# EAGLE board hydrogen_sensors_board (EAGLE 7.7.0)
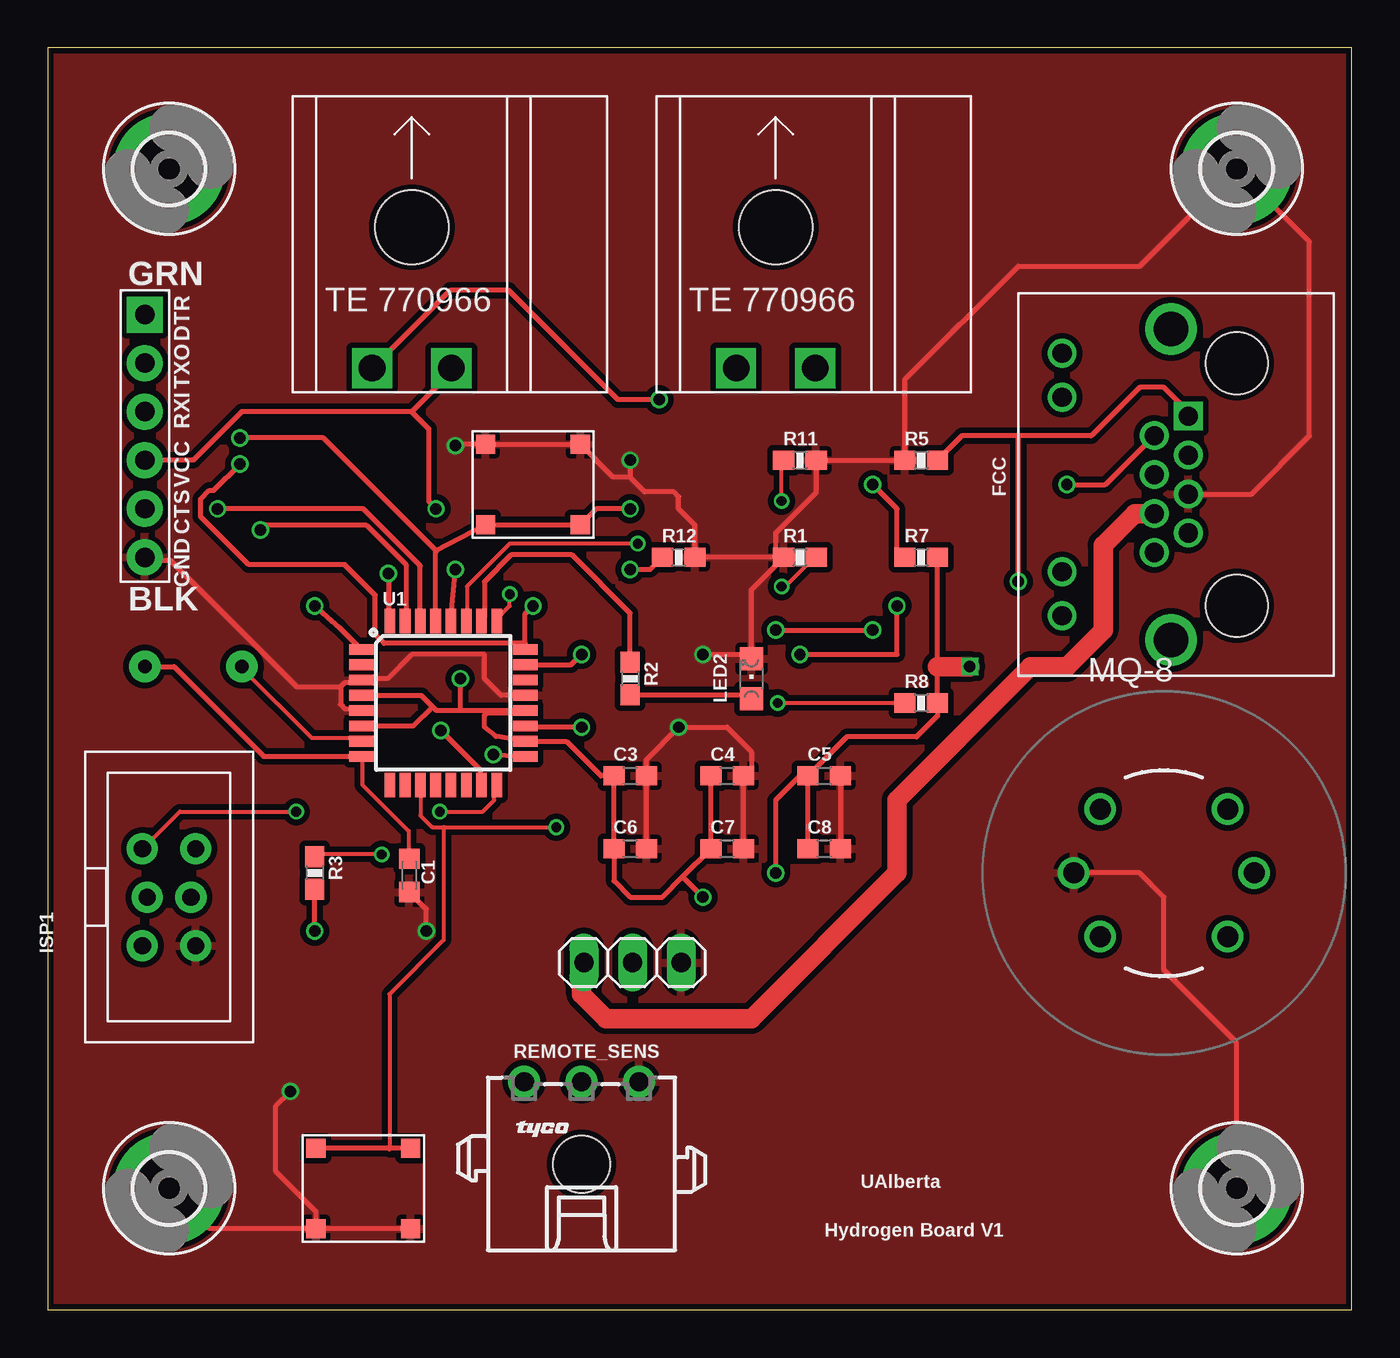
[diagram p0: board, top side]
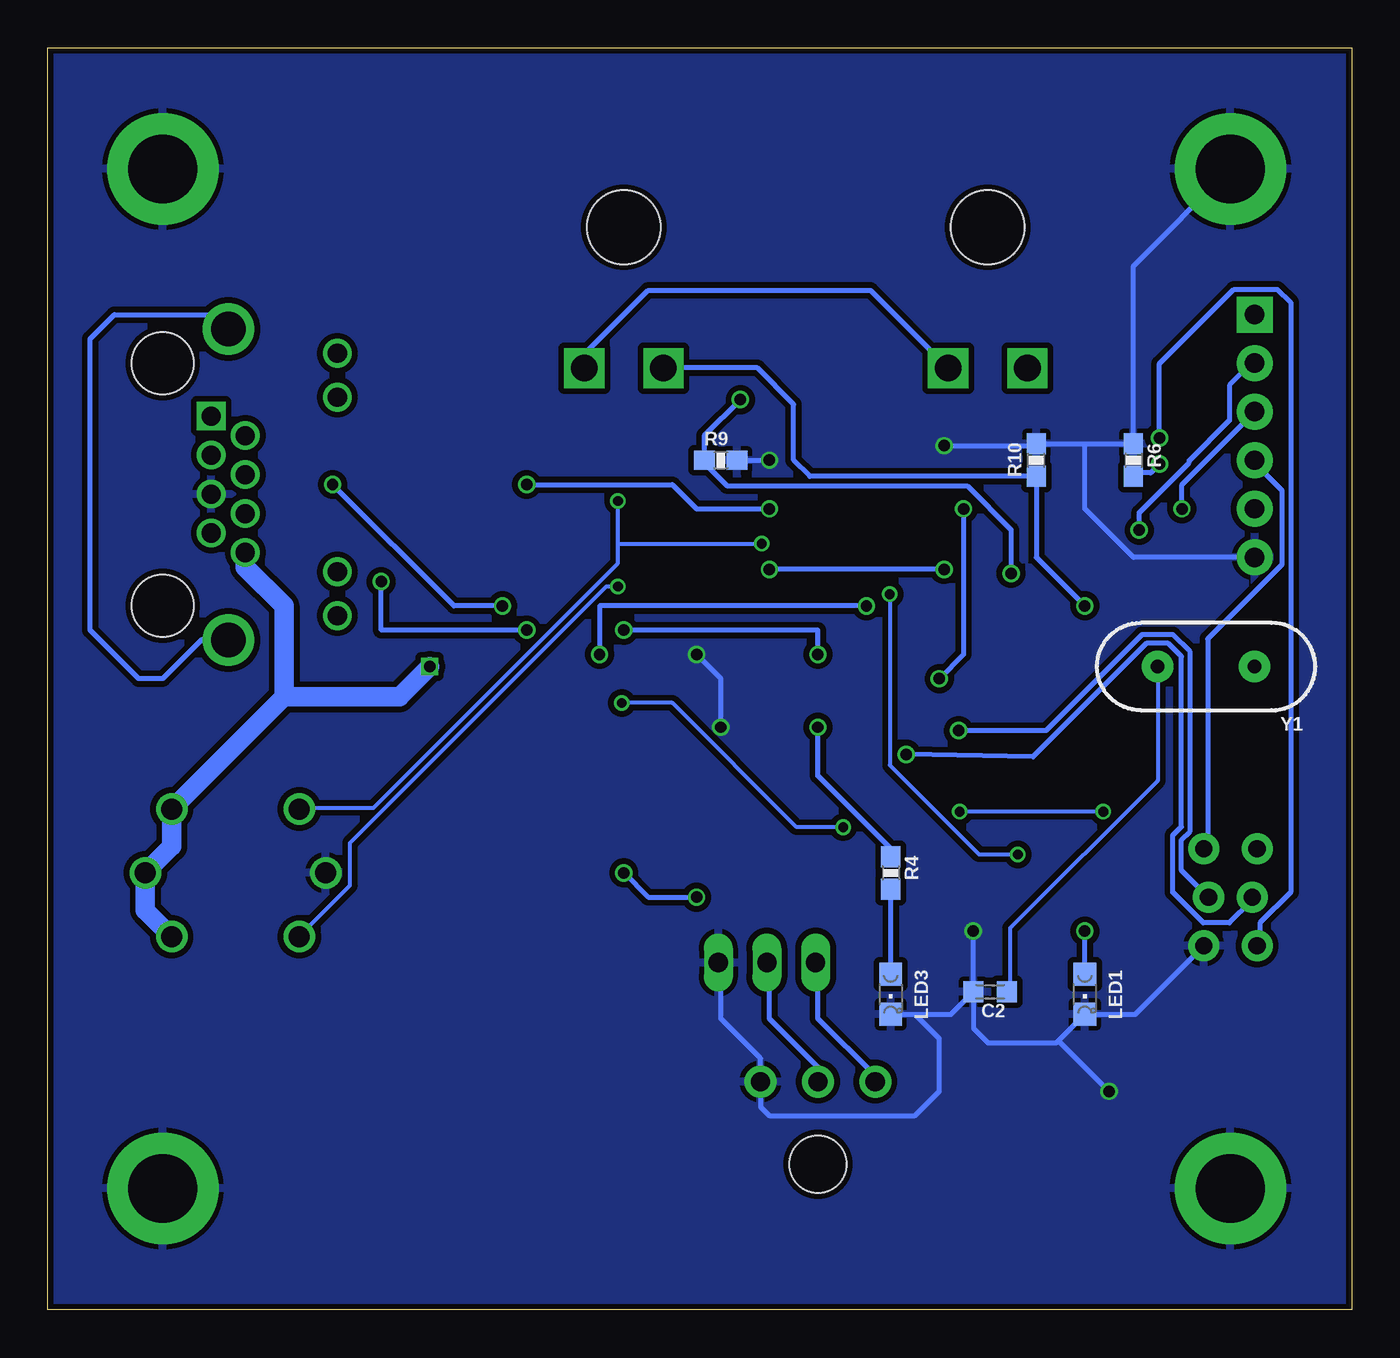
[diagram p1: board, bottom side, seen from below]

Size 68.25 x 66.03 mm. Coordinates in mm from the lower left corner, seen from the top.
Outline: 0,0 68.25,0 68.25,66.03 0,66.03 0,0
Copper layers (1*16): Top 0.035mm / dielectric 1.5mm / Bottom 0.035mm
Design rules "SeeedStudio_2layer_DRU_no_angle_20140221": minimum track width 6mil, minimum drill 12mil, track to track 6mil, track to pad 6mil, pad to pad 6mil, via to via 6mil, smd to smd 0mil, copper to edge 10mil, drill to drill 10mil, minimum pad ring 10mil, minimum via ring 6mil, stop-mask expansion 2mil, vias tented up to drill 100mil, thermal gap 10mil

## Footprints (pad centres in the part's own frame; a part is rotated, then mirrored left to right if it is on the bottom)
C0603K = smd 1.05 x 1.08: 1 -0.875,0; 2 0.875,0
C0603 = smd 1.1 x 1: 1 -0.85,0; 2 0.85,0
A122645-ND = drill 1 square: P$1 3.58,2.54 | drill 1: P$2 2.56,4.32; P$3 1.54,2.54; P$4 0.52,4.32; P$5 -0.5,2.54; P$6 -1.52,4.32; P$7 -2.54,2.54; P$8 -3.56,4.32; P$9 -6.86,9.14; P$10 -4.57,9.14; P$11 4.57,9.14; P$12 6.86,9.14 | drill 1.8: P$13 -8.13,3.43; P$14 8.13,3.43 | hole 3.25: -6.35,0; 6.35,0
3,6-PAD = drill 3.6 pad 5.842: B3,6 0,0
AVRISP-BOX = drill 0.9 pad 1.626: 1 -1.397,2.54; 2 1.397,2.54; 3 -1.143,0; 4 1.143,0; 5 -1.397,-2.54; 6 1.397,-2.54
1X03 = drill 1.016 long: 1 -2.54,0; 2 0,0; 3 2.54,0
FTDI_DEVICE_SIDE = drill 1.016 pad 1.88 square: P$1 -6.35,0 | drill 1.016 pad 1.88: P$2 -3.81,0; P$3 -1.27,0; P$4 1.27,0; P$5 3.81,0; P$6 6.35,0
CHIPLED_0805 = smd 1.2 x 1.2: A 0,-1.05; C 0,1.05
0603-RES = smd 1.1 x 1: 1 -0.85,0; 2 0.85,0
1445055-3 = drill 1 pad 1.676: 1 3,4.32; 2 0,4.32; 3 -3,4.32 | hole 3: 0,0
TQFP32-08 = smd 1.27 x 0.559: 1 -4.293,2.8; 2 -4.293,2; 3 -4.293,1.2; 4 -4.293,0.4; 5 -4.293,-0.4; 6 -4.293,-1.2; 7 -4.293,-2; 8 -4.293,-2.8; 17 4.293,-2.8; 18 4.293,-2; 19 4.293,-1.2; 20 4.293,-0.4; 21 4.293,0.4; 22 4.293,1.2; 23 4.293,2; 24 4.293,2.8 | smd 0.559 x 1.27: 9 -2.8,-4.293; 10 -2,-4.293; 11 -1.2,-4.293; 12 -0.4,-4.293; 13 0.4,-4.293; 14 1.2,-4.293; 15 2,-4.293; 16 2.8,-4.293; 25 2.8,4.293; 26 2,4.293; 27 1.2,4.293; 28 0.4,4.293; 29 -0.4,4.293; 30 -1.2,4.293; 31 -2,4.293; 32 -2.8,4.293
MQ-8 = drill 1.1: 1 -3.337,3.337; 2 -4.72,0; 3 -3.337,-3.337; 4 3.337,-3.337; 5 4.72,0; 6 3.337,3.337
EG4621CT-ND = smd 1 x 1: P$1 -2.475,2.1; P$2 2.475,2.1; P$3 -2.475,-2.1; P$4 2.475,-2.1
2X1-MATE-N-LOCK = drill 1.4 square: CIRCUIT1 -2.07,14.23; CIRCUIT2 2.07,14.23 | hole 3.86: 0,6.86
HC49US = drill 0.7 pad 1.651: 1 -2.54,0; 2 2.54,0

## Placement (x,y rotation side)
C1  22pF  [C0603K]  18.92,22.73 270 top
C2  22pF  [C0603K]  18.92,16.64 180 bottom
C3  [C0603]  30.48,27.94 0 top
C4  [C0603]  35.56,27.94 0 top
C5  [C0603]  40.64,27.94 0 top
C6  [C0603]  30.48,24.13 0 top
C7  [C0603]  35.56,24.13 0 top
C8  [C0603]  40.64,24.13 0 top
ETH1  FCC  [A122645-ND]  62.23,43.18 90 top
H1  MOUNT-PAD-ROUND3.6  [3,6-PAD]  6.35,59.69 0 top
H2  MOUNT-PAD-ROUND3.6  [3,6-PAD]  62.23,59.69 0 top
H3  MOUNT-PAD-ROUND3.6  [3,6-PAD]  62.23,6.35 0 top
H4  MOUNT-PAD-ROUND3.6  [3,6-PAD]  6.35,6.35 0 top
ISP1  AVRISP-BOX  [AVRISP-BOX]  6.35,21.59 0 top
JP4  [1X03]  30.61,18.16 180 top
JP6  FTDI_DEVICE  [FTDI_DEVICE_SIDE]  5.08,45.72 270 top
LED1  [CHIPLED_0805]  13.97,16.51 180 bottom
LED2  [CHIPLED_0805]  36.83,33.02 0 top
LED3  [CHIPLED_0805]  24.13,16.51 180 bottom
R1  10k  [0603-RES]  39.37,39.37 0 top
R2  1k  [0603-RES]  30.48,33.02 270 top
R3  1k  [0603-RES]  13.97,22.86 270 top
R4  1k  [0603-RES]  24.13,22.86 270 bottom
R5  10k  [0603-RES]  45.72,44.45 0 top
R6  10k  [0603-RES]  11.43,44.45 270 bottom
R7  10k  [0603-RES]  45.72,39.37 0 top
R8  10k  [0603-RES]  45.72,31.75 0 top
R9  10k  [0603-RES]  33.02,44.45 0 bottom
R10  10k  [0603-RES]  16.51,44.45 90 bottom
R11  100k  [0603-RES]  39.37,44.45 0 top
R12  100k  [0603-RES]  33.02,39.37 0 top
REMOTE_SENS  1445055-3  [1445055-3]  27.94,7.62 0 top
U1  ATMEGA328P_TQFP  [TQFP32-08]  20.7,31.75 0 top
U$1  MQ-8MQ-8  [MQ-8]  58.42,22.86 0 top
U$2  EG4621CT-ND  [EG4621CT-ND]  16.51,6.35 180 top
U$3  TE770966  [2X1-MATE-N-LOCK]  38.1,63.5 180 top
U$9  TE770966  [2X1-MATE-N-LOCK]  19.05,63.5 180 top
U$10  EG4621CT-ND  [EG4621CT-ND]  25.4,43.18 0 top
Y1  16MHz  [HC49US]  7.62,33.66 180 bottom

## Library data of the parts
C1-C8 ISP1 LED1-LED3 = adafruit
ETH1 = ETHERNET
H1-H4 = holes
JP4 = pinhead
JP6 = SparkFun-Connectors
R1 R5 R6 R9 R10 = SparkFun-Passives
R2-R4 R7 R8 R11 R12 = SparkFun-Resistors
REMOTE_SENS = con-amp
U1 = SparkFun-DigitalIC; PROD_ID: IC-09069
U$1 = donny_library
U$2 U$10 = EG4621CT-ND
U$3 U$9 = Shell2013
Y1 = SparkFun-FreqCtrl

## Nets
+5V: C3.1 C4.1 C5.1 C6.1 C7.1 C8.1 ETH1.P$8 ISP1.2 JP6.P$4 R7.2 R8.2 U1.4 U1.6 U1.18 U1.20 U$1.4 U$1.5 U$1.6 U$3.CIRCUIT1 U$9.CIRCUIT1
+12V: ETH1.P$6 JP4.3 REMOTE_SENS.3
ATM_RESET: ISP1.5 R7.1 U1.29 U$10.P$3 U$10.P$4
ESTOP1: R9.1 U1.32 U$9.CIRCUIT2
ESTOP2: R10.1 U1.1 U$3.CIRCUIT2
EXTRA_SIG: ETH1.P$2 R6.2 U1.24
GND: C1.2 C2.2 C3.2 C4.2 C5.2 C6.2 C7.2 C8.2 ETH1.P$5 H1.B3,6 H2.B3,6 H3.B3,6 H4.B3,6 ISP1.6 JP4.1 JP6.P$6 LED1.C LED2.C LED3.C R1.1 R5.1 R6.1 R9.2 R10.2 R11.2 R12.2 REMOTE_SENS.1 U1.3 U1.5 U1.21 U$1.2 U$2.P$1 U$2.P$2 U$10.P$1 U$10.P$2
H2_OK: ETH1.P$1 R5.2 U1.23
H2_REMOTE: JP4.2 REMOTE_SENS.2
H2OUT: R11.1 U1.27 U$1.1
H2OUT_2: R12.1 U1.28
MISO: ISP1.1 U1.16
MOSI: ISP1.4 U1.15
N$1: C2.1 U1.7 Y1.2
N$2: R1.2 U$1.3
N$3: C1.1 U1.8 Y1.1
N$4: R3.1 U1.25
N$5: R2.1 U1.26
N$6: R4.1 U1.19
N$7: LED1.A R3.2
N$8: LED2.A R2.2
N$9: LED3.A R4.2
N$10: ETH1.P$13 ETH1.P$14
N$16: ETH1.P$3
N$22: ETH1.P$10
N$23: ETH1.P$9
N$24: ETH1.P$12
N$25: ETH1.P$11
RXD: JP6.P$3 U1.30
SCK: ISP1.3 U1.17
TARE: R8.1 U1.11 U$2.P$3 U$2.P$4
TXD: JP6.P$2 U1.31

## Tracks (layer width: path | path; a pad name or v marks a point on that pad's centre or on a via)
+5V  (via drill 0.6)
  Top 0.254: U$9.CIRCUIT1 21.12,49.06 19.05,46.99 | 19.05,46.99 10.16,46.99 7.62,44.45 JP6.P$4 | 21.59,31.35 U1.20 24.89,31.24 22.99,31.24 22.86,31.11 22.86,30.48 23.46,30 U1.18 25.03,29.72 27.18,29.72 28.96,27.94 C3.1 C6.1 29.63,22.44 30.48,21.59 32.17,21.59 33.23,22.65 | 21.59,31.35 20.34,31.35 20.13,31.56 | 20.13,31.56 19.56,32.13 16.43,32.13 U1.4 | U1.6 19.12,30.55 20.13,31.56 | 19.05,46.99 19.94,46.1 19.94,42.29 v20.32,41.91 | v21.59,33.02 21.59,31.35 | R7.2 46.57,33.66 R8.2 46.57,31.08 45.47,29.97 41.82,29.97 C5.1 | C8.1 C5.1 | C4.1 C7.1 33.23,22.65 | C5.1 39.37,27.94 38.1,26.67 v38.1,22.86 | v34.29,21.59 33.23,22.65
  Top 1.016: v48.26,33.66 46.57,33.66
  Bottom 0.254: U$3.CIRCUIT1 40.17,50 36.83,53.34 25.19,53.34 U$9.CIRCUIT1 | v20.32,41.91 20.32,34.29 v21.59,33.02 | ISP1.2 7.54,24.13 7.54,35.1 3.66,38.99 3.66,42.88 5.03,44.25 JP6.P$4 | v38.1,22.86 36.83,21.59 v34.29,21.59
  Bottom 1.016: ETH1.P$8 57.91,38.86 55.88,36.83 55.88,32.08 | 55.88,32.08 U$1.6 61.76,24.24 U$1.5 63.14,20.91 U$1.4 | 55.88,32.08 49.84,32.08 v48.26,33.66
+12V
  Top 1.016: ETH1.P$6 56.9,41.66 55.24,40.01 55.24,35.56 53.34,33.66 51.44,33.66 44.45,26.67 44.45,22.86 36.83,15.24 29.21,15.24 27.94,16.51 27.94,18.03 JP4.3
  Bottom 0.254: REMOTE_SENS.3 24.94,12.24 27.94,15.24 27.94,18.03 JP4.3
ATM_RESET  (via drill 0.6, 0.61)
  Top 0.254: U1.29 20.3,39.67 | 20.3,39.67 20.3,39.73 U$10.P$3 U$10.P$4 28.7,41.91 v30.48,41.91 | R7.1 44.45,39.37 44.45,41.91 v43.18,43.18 | v10.06,45.62 14.4,45.62 20.34,39.67 20.3,39.67
  Bottom 0.254: v43.18,43.18 35.56,43.18 34.29,41.91 v30.48,41.91 | v10.06,45.62 10.06,49.51 6.17,53.39 3.89,53.39 3.2,52.7 3.2,21.84 4.8,20.24 4.8,19.1 ISP1.5
ESTOP1  (via drill 0.6, 0.61)
  Top 0.254: v32,47.62 29.84,47.62 24.13,53.34 21.05,53.34 U$9.CIRCUIT2 | v17.83,38.53 17.83,36.25 U1.32
  Bottom 0.254: v32,47.62 33.87,45.76 R9.1 33.83,44.25 32.69,43.1 20.12,43.1 17.83,40.82 v17.83,38.53
ESTOP2  (via drill 0.6)
  Top 0.254: v13.97,36.83 15.24,35.72 U1.1
  Bottom 0.254: U$3.CIRCUIT2 31.11,49.28 29.21,47.37 29.21,44.45 28.36,43.6 R10.1 16.51,39.37 v13.97,36.83
EXTRA_SIG  (via drill 0.6, 0.61)
  Top 0.254: U1.24 24.99,34.87 | 24.99,34.87 24.99,36.42 v25.4,36.83 | v39.37,34.29 44.45,34.29 v44.45,36.83 | v53.34,43.18 55.35,43.18 ETH1.P$2 | v10.06,44.25 8.69,42.88 8.46,42.88 8,42.42 8,41.5 10.52,38.99 15.54,38.99 17.14,37.39 17.14,35.33 17.6,34.87 24.99,34.87
  Bottom 0.254: v25.4,36.83 39.37,36.83 v39.37,34.29 | v44.45,36.83 46.99,36.83 v53.34,43.18 | v10.06,44.25 10.52,43.79 11.43,43.79 R6.2
GND  (via drill 0.6)
  Top 0.254: R1.1 R12.2 33.87,41.06 33.02,41.91 33.02,42.55 32.77,42.8 31.24,42.8 30.48,43.56 | R1.1 36.83,37.68 LED2.C 36.61,34.29 v34.29,34.29 | R1.1 38.1,39.79 38.1,40.64 40.22,42.76 R11.2 R5.1 44.87,48.68 50.8,54.61 57.15,54.61 H2.B3,6 66.04,55.88 66.04,45.72 63,42.68 ETH1.P$5 | v21.34,45.21 21.4,45.28 U$10.P$1 U$10.P$2 29.59,43.56 30.48,43.56 | U1.21 23.73,32.15 22.86,33.02 22.86,34.29 19.05,34.29 17.78,33.02 16.48,33.02 U1.3 16.23,32.82 15.54,32.82 15.32,32.59 | v30.48,44.45 30.48,43.56 | 15.32,32.59 15.32,31.67 15.54,31.45 16.23,31.45 U1.5 | 15.32,32.59 13.03,32.59 6.4,39.22 5.26,39.22 JP6.P$6 | H3.B3,6 62.23,13.97 58.42,17.78 58.42,21.59 57.15,22.86 U$1.2 | C5.2 C8.2 | U$2.P$1 U$2.P$2 | U$2.P$2 8.45,4.25 H4.B3,6 | U$2.P$2 14.04,5.14 11.94,7.24 11.94,10.67 v12.7,11.43 | v19.81,19.81 19.81,20.97 C1.2 | C7.2 C4.2 36.83,28.36 36.83,29.21 35.56,30.48 v33.02,30.48 31.33,28.79 C3.2 C6.2
  Bottom 0.254: 13.97,45.3 R10.2 16.6,45.21 v21.34,45.21 | 13.97,45.3 R6.1 11.43,54.61 H1.B3,6 | JP6.P$6 11.43,39.37 13.97,41.91 13.97,45.3 | R9.2 v30.48,44.45 | LED3.C 22.86,15.46 | 22.86,15.46 20.98,15.46 C2.2 | C2.2 19.8,14.72 19.05,13.97 15.46,13.97 15.35,14.08 | 15.35,14.08 LED1.C 11.34,15.46 ISP1.6 | v12.7,11.43 15.35,14.08 | C2.2 19.8,19.8 v19.81,19.81 | v33.02,30.48 33.02,33.02 v34.29,34.29 | 22.86,15.46 21.59,14.19 21.59,11.43 22.86,10.16 30.48,10.16 30.94,10.62 REMOTE_SENS.1 30.94,13.16 33.02,15.24 33.02,18.03 JP4.1
  pour Top (isolate 0.305): 0,0 0,66.04 68.58,66.04 68.58,0
  pour Bottom (isolate 0.305): 0,0 0,66.04 68.58,66.04 68.58,0
H2_OK  (via drill 0.6)
  Top 0.254: ETH1.P$1 59.69,46.99 58.42,48.26 57.15,48.26 54.61,45.72 50.8,45.72 | 50.8,45.72 47.84,45.72 R5.2 | U1.23 27.4,33.75 v27.94,34.29 | v38.1,35.56 v43.18,35.56 | v50.8,38.1 50.8,45.72
  Bottom 0.254: v27.94,34.29 27.94,35.56 v38.1,35.56 | v43.18,35.56 50.8,35.56 v50.8,38.1
H2_REMOTE
  Bottom 0.254: REMOTE_SENS.2 27.94,12.7 30.48,15.24 30.48,18.03 JP4.2
H2OUT  (via drill 0.51)
  Top 0.203: v38.41,42.32 38.41,44.35 R11.1 | v30.89,40.08 24.18,40.08 21.95,37.85 21.95,36.22 U1.27
  Bottom 0.203: 38.41,40.08 38.41,39.06 51.21,26.26 55.07,26.26 U$1.1 | 38.41,40.08 v38.41,42.32 | 38.41,40.08 v30.89,40.08
H2OUT_2  (via drill 0.6)
  Top 0.254: U1.28 21.08,36.04 v21.34,38.73 | v30.48,38.73 31.54,38.73 R12.1
  Bottom 0.254: v21.34,38.73 v30.48,38.73
MISO  (via drill 0.51)
  Top 0.203: v20.52,26.06 22.76,26.06 23.37,26.67 23.37,27.28 U1.16 | v13.01,26.06 6.91,26.06 5.08,24.23 ISP1.1
  Bottom 0.203: v13.01,26.06 v20.52,26.06
MOSI  (via drill 0.61)
  Top 0.254: v20.57,30.3 22.63,28.25 22.63,27.56 U1.15
  Bottom 0.254: v20.57,30.3 16,30.3 10.97,35.33 9.37,35.33 8.46,34.42 8.46,25.04 8.91,24.59 8.91,22.99 7.54,21.61 ISP1.4
N$1
  Top 0.203: U1.7 16.26,29.92 13.82,29.92 10.16,33.58 Y1.2
  Bottom 0.203: Y1.2 10.16,27.69 17.88,19.96 17.88,16.71 C2.1
N$2  (via drill 0.51)
  Top 0.203: v38.41,37.85 38.61,37.85 40.03,39.27 R1.2
  Bottom 0.203: v38.41,37.85 39.01,37.85 52.43,24.43 52.43,22.2 55.07,19.56 U$1.3
N$3
  Top 0.203: C1.1 18.9,23.62 18.9,25.04 16.46,27.48 16.46,28.91 U1.8
  Top 0.254: Y1.1 6.6,33.66 11.3,28.96 U1.8
N$4  (via drill 0.51)
  Top 0.203: v17.48,23.82 14.02,23.82 R3.1 | v24.18,37.44 24.18,36.83 23.57,36.22 U1.25
  Bottom 0.203: v17.48,23.82 19.51,23.82 24.18,28.5 v24.18,37.44
N$5
  Top 0.254: R2.1 30.48,36.45 27.43,39.5 24.26,39.5 22.86,38.1 22.86,36.2 U1.26
N$6  (via drill 0.6)
  Top 0.254: v27.94,30.48 25.06,30.48 U1.19
  Bottom 0.254: R4.1 24.13,24.13 27.94,27.94 v27.94,30.48
N$7  (via drill 0.6)
  Top 0.254: v13.97,19.81 R3.2
  Bottom 0.254: LED1.A v13.97,19.81
N$8
  Top 0.254: R2.2 36.63,32.17 LED2.A
N$9
  Bottom 0.254: LED3.A R4.2
N$10
  Bottom 0.254: ETH1.P$13 60.2,35.05 62.23,33.02 63.5,33.02 66.04,35.56 66.04,50.8 64.77,52.07 59.56,52.07 ETH1.P$14
RXD  (via drill 0.6)
  Top 0.254: U1.30 19.5,38.92 16.51,41.91 v8.89,41.91
  Bottom 0.254: v8.89,41.91 8.89,43.18 JP6.P$3
SCK  (via drill 0.61)
  Top 0.254: v23.32,29.06 24.92,28.93 U1.17
  Bottom 0.254: v23.32,29.06 16.69,28.93 10.74,34.87 9.6,34.87 8.91,34.19 8.91,25.27 9.37,24.82 9.37,21.84 7.77,20.24 6.4,20.24 5.26,21.39 ISP1.3
TARE  (via drill 0.51)
  Top 0.203: v38.2,31.75 R8.1 | 20.73,25.25 20.12,25.25 19.51,25.86 19.51,27.28 U1.11 | 20.73,25.25 v26.62,25.25 | 20.73,25.25 20.73,19.36 17.88,16.51 17.88,8.45 17.88,8.38
  Top 0.254: U$2.P$3 17.88,8.45 U$2.P$4
  Bottom 0.203: v38.2,31.75 35.56,31.75 29.06,25.25 v26.62,25.25
TXD  (via drill 0.61)
  Top 0.254: U1.31 18.75,36.25 18.75,38.99 16.69,41.05 11.38,41.05 v11.12,40.79
  Bottom 0.254: JP6.P$2 5.26,49.51 6.4,48.36 6.4,46.53 8.51,44.42 8.51,44.32 11.12,41.71 v11.12,40.79

## Text on the board
tPlace: UAlberta | Hydrogen Board V1